# Altium PCB PCB2.PcbDoc
Units mm, origin at the board's own origin, x right, y up, seen from the top; angles counter-clockwise.
Board outline 50 x 50 mm, 2 copper layers (Top Layer, Bottom Layer); 21 components, 15 nets, 86 pads, 2 vias.
Unrouted connection lines stored in the file: 4.
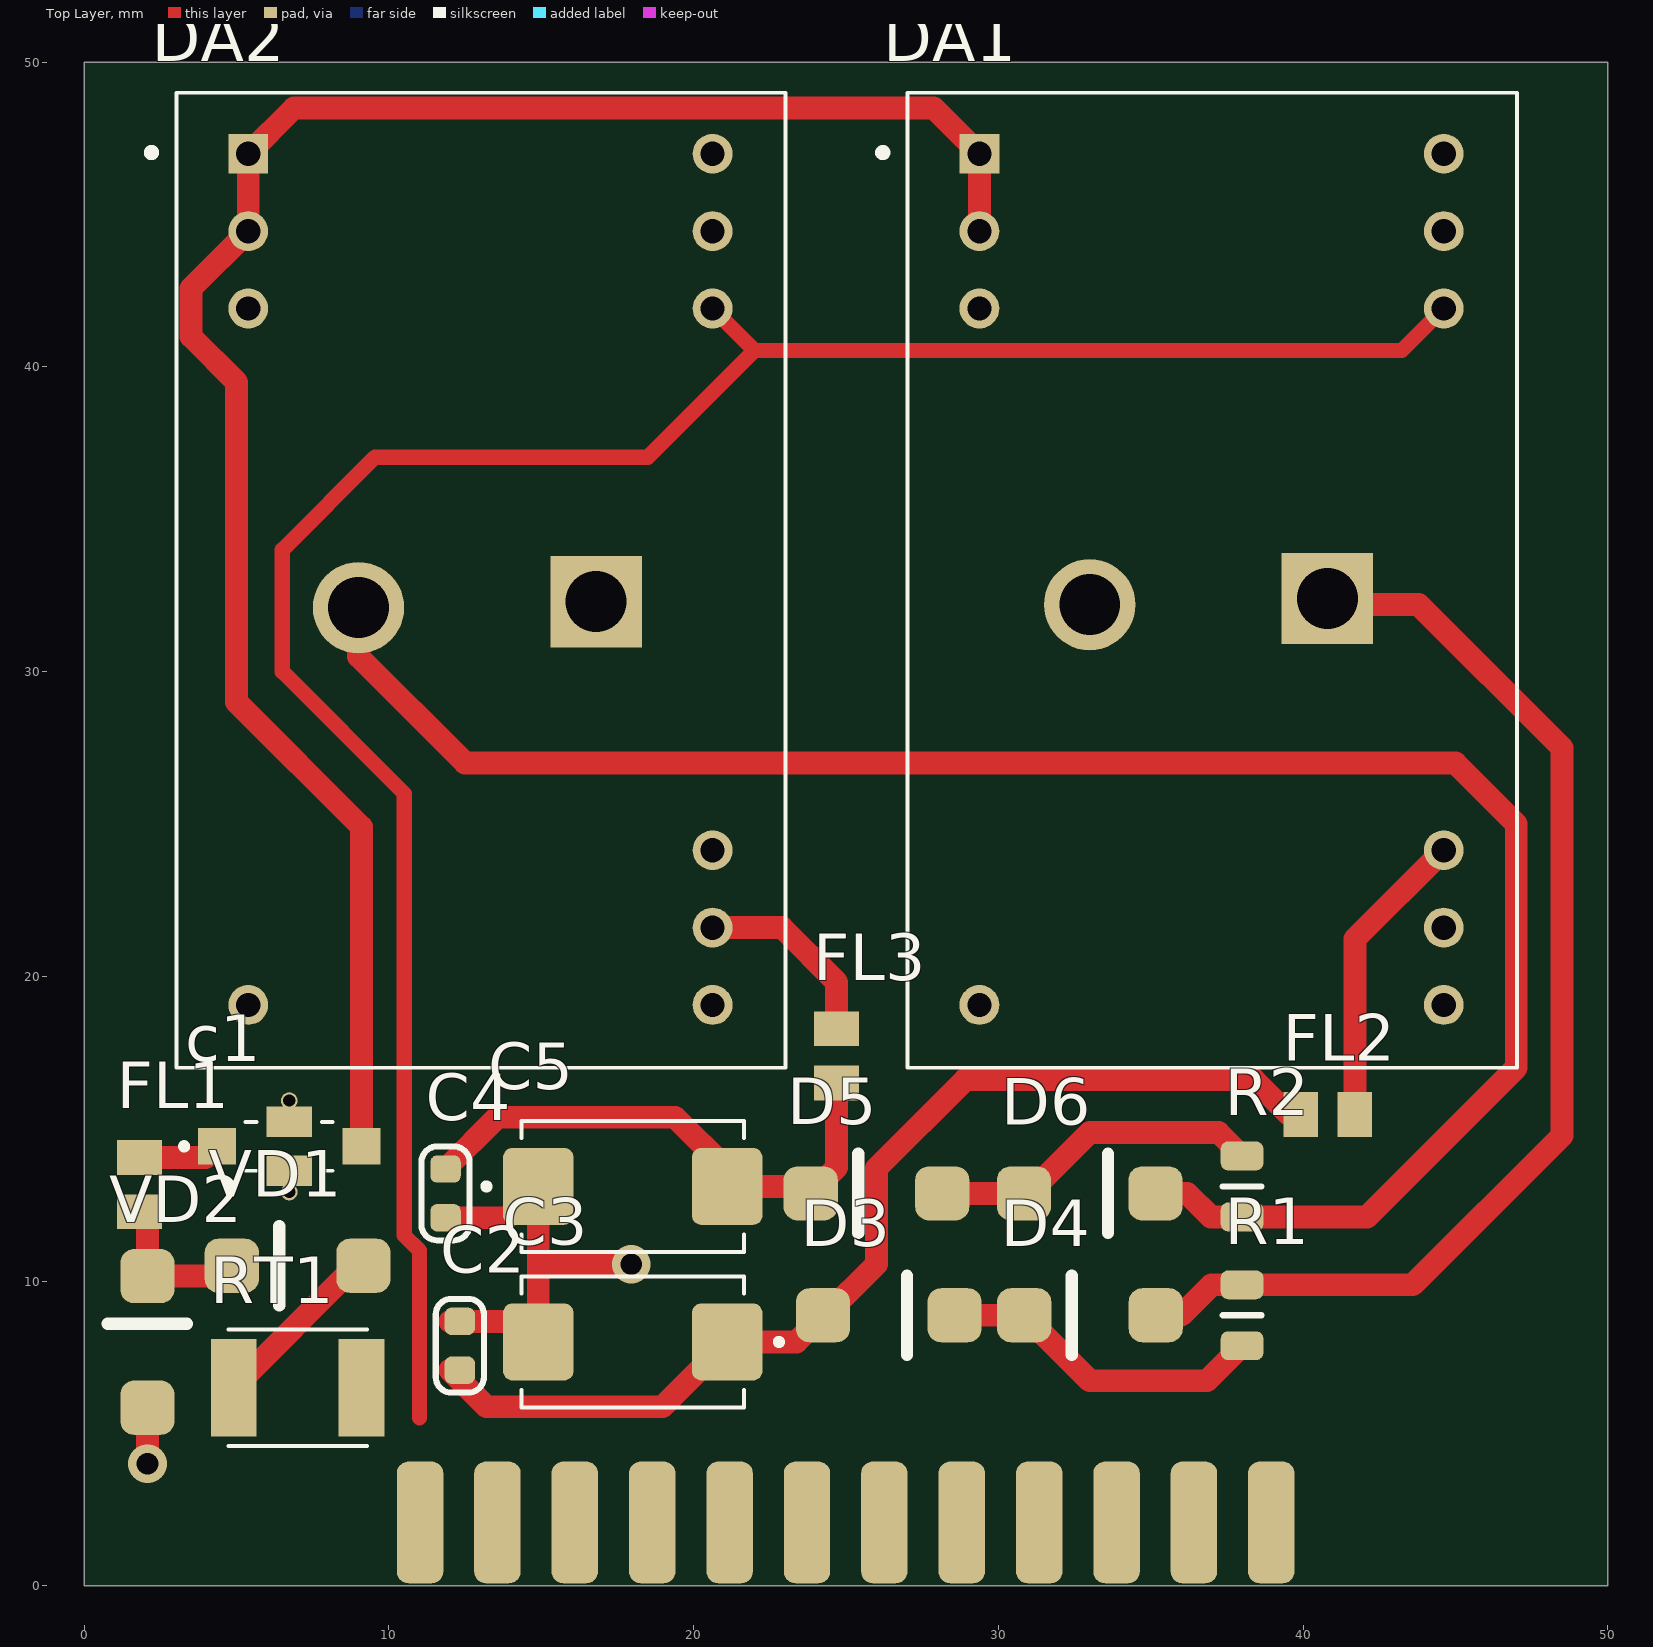
[diagram p0: Top Layer view]
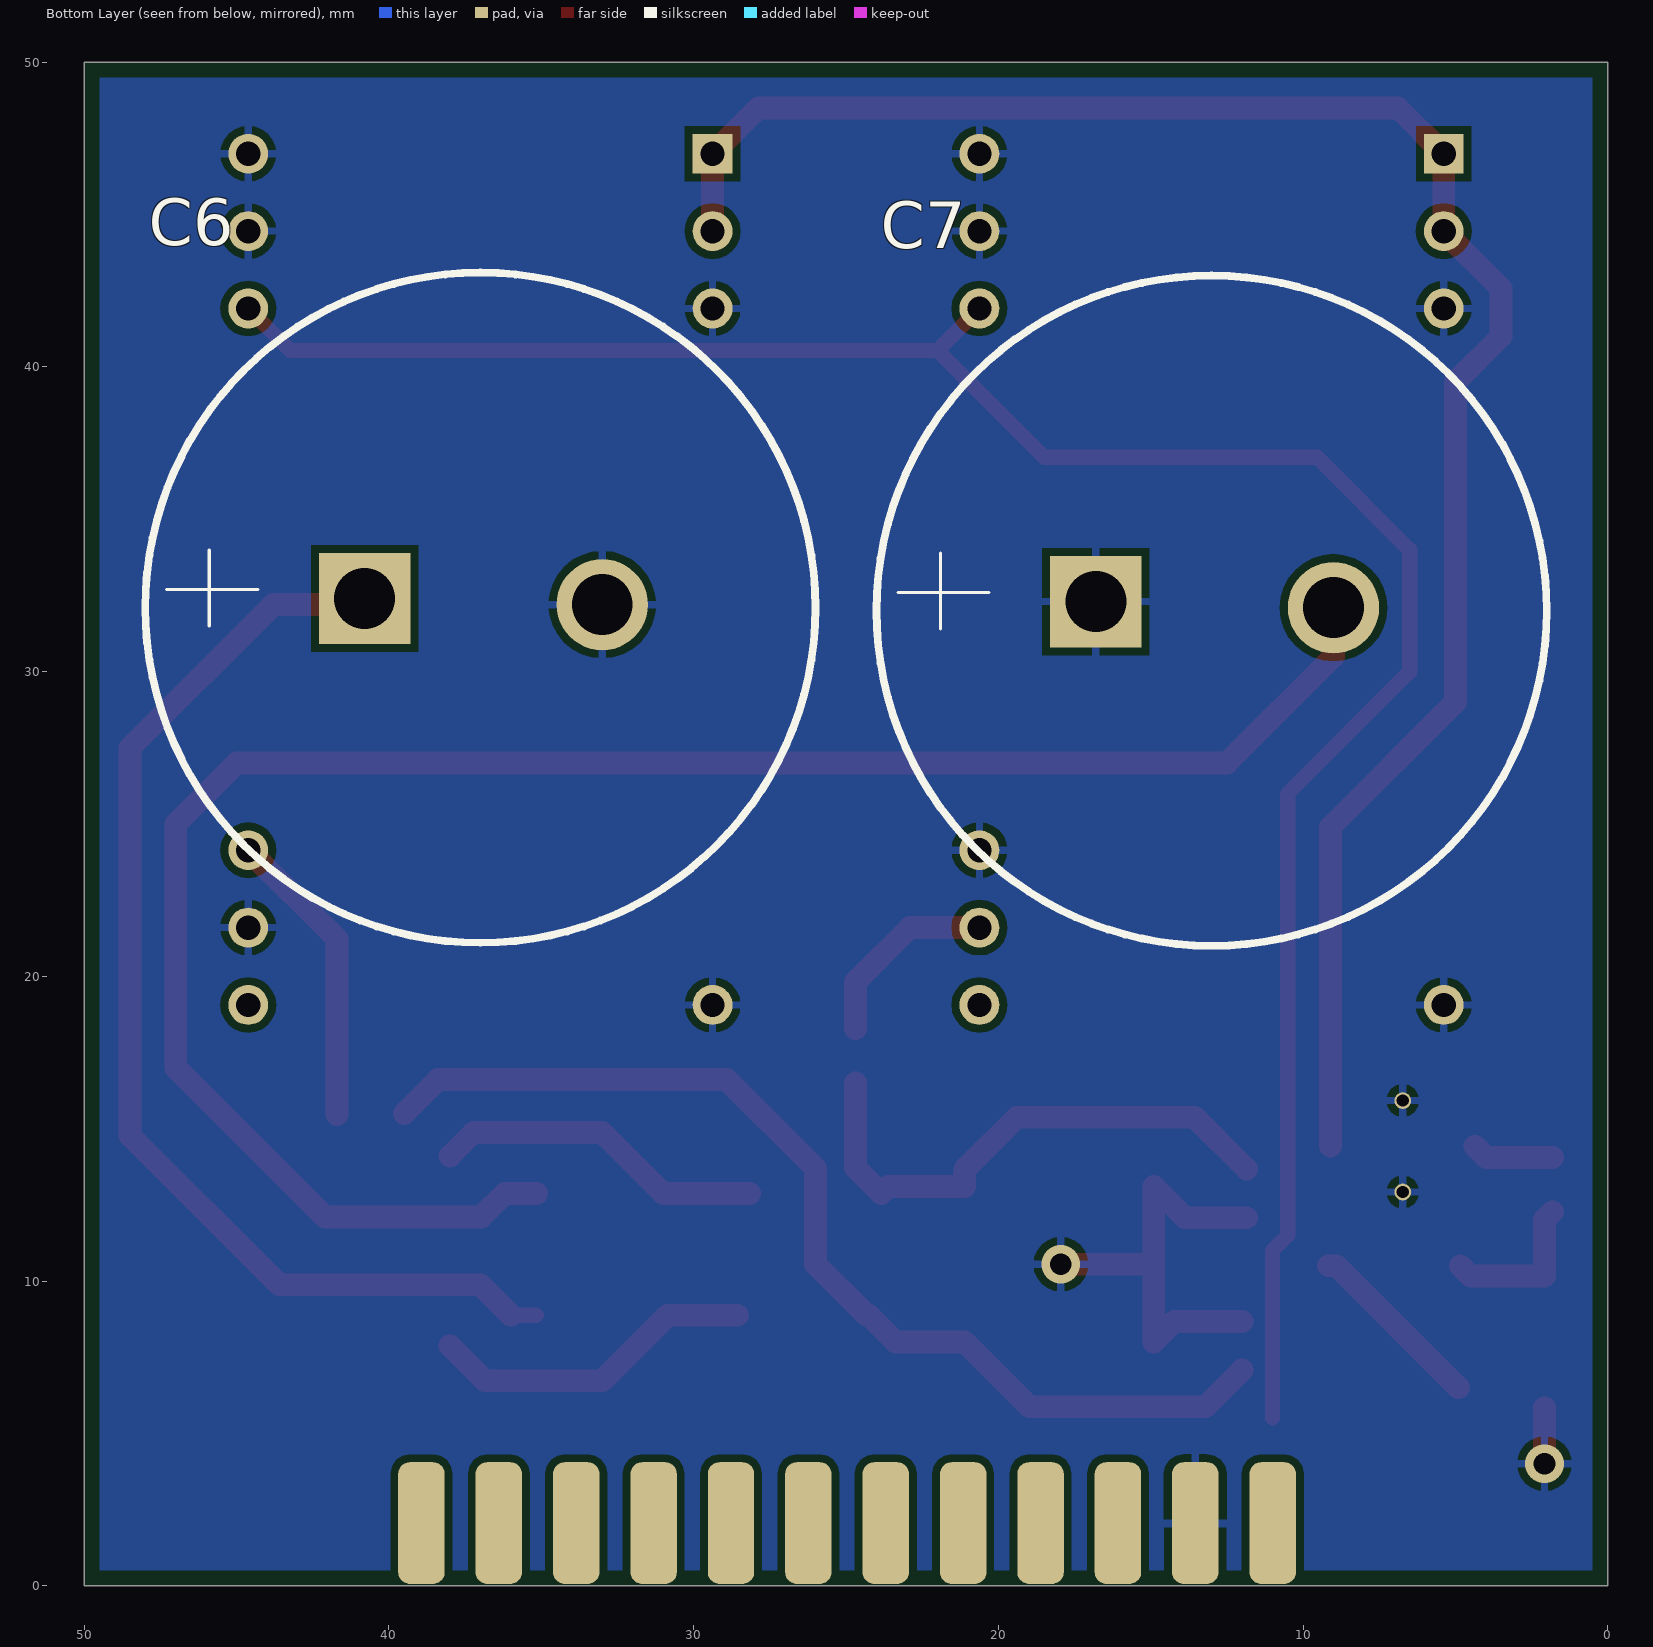
[diagram p1: Bottom Layer view, seen from below]
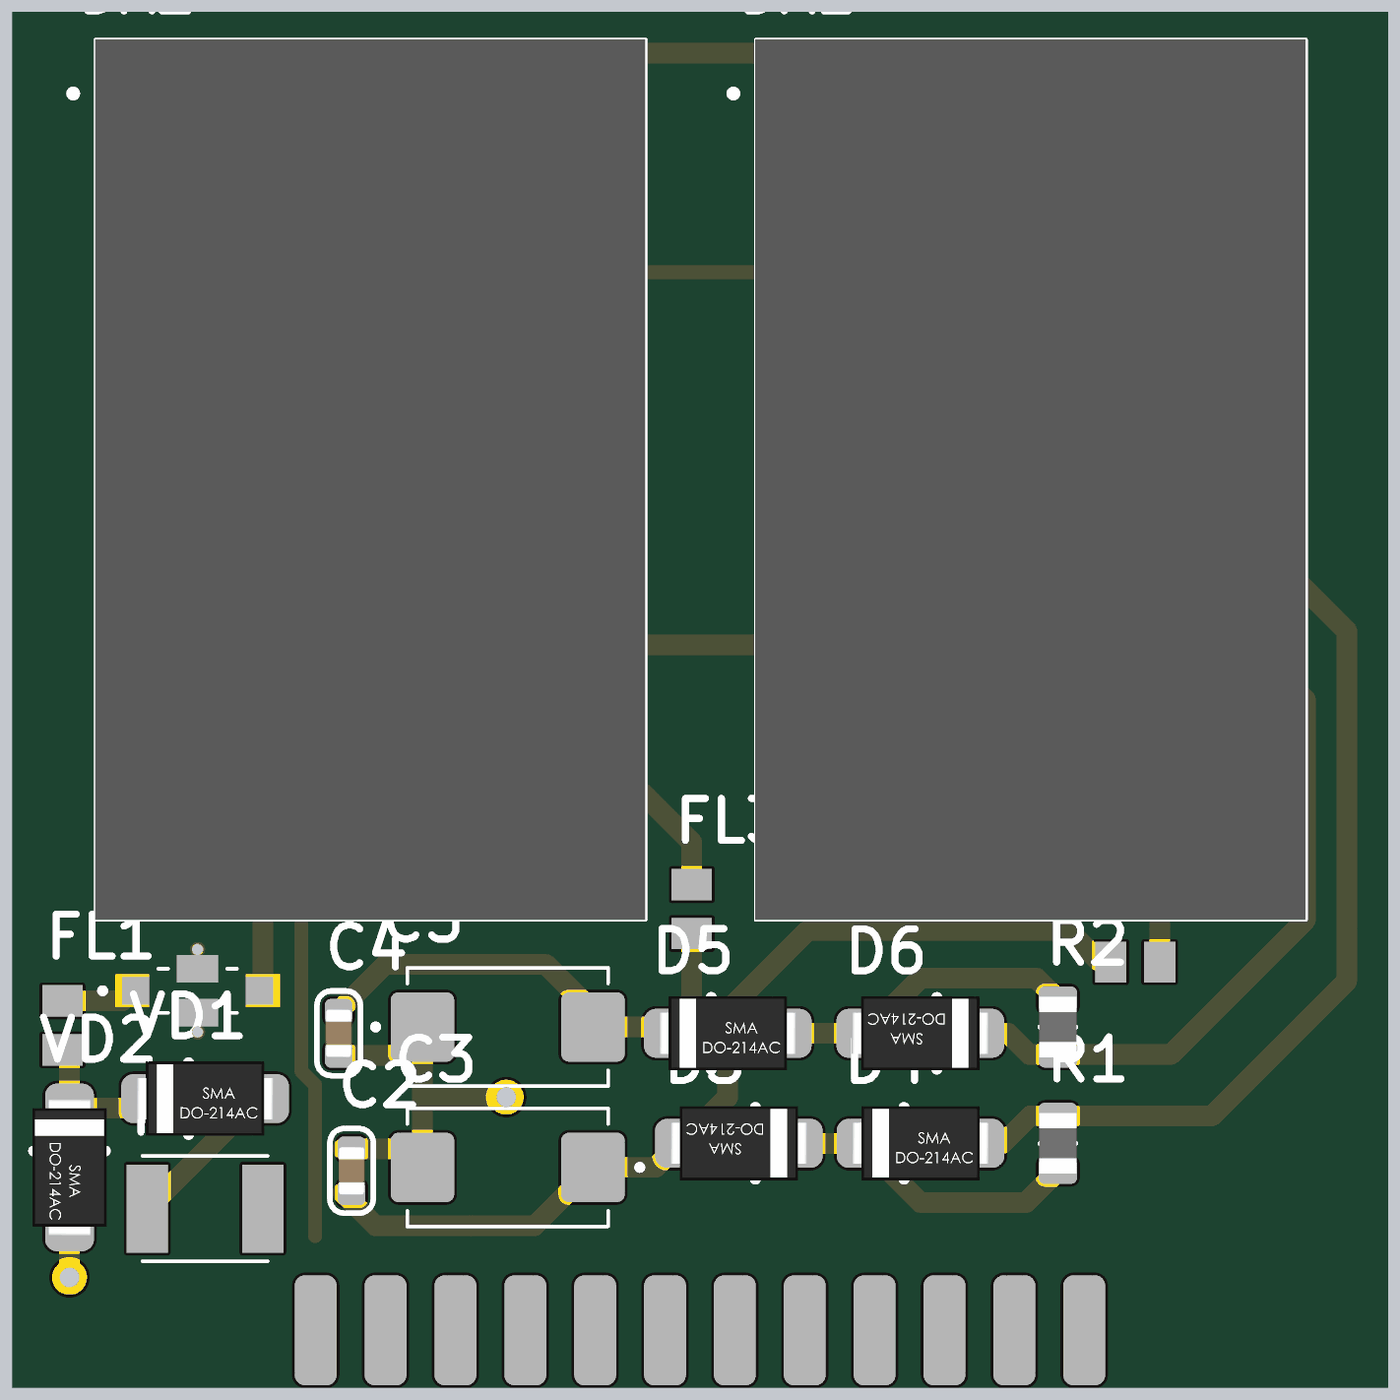
[diagram p2: 3D render of the assembled board from above, using the file's embedded part models]

## Layer stack, top to bottom
Top Solder: solder mask 0.0102, Solder Resist, Dk 3.5
Top Layer: signal copper 0.0356
Dielectric 1: dielectric 0.32, FR-4, Dk 4.8
Bottom Layer: signal copper 0.0356
Bottom Solder: solder mask 0.0102, Solder Resist, Dk 3.5

## Board outline
0,0 50,0 50,50 0,50

## Design rules (kind name [scope] priority, off if disabled: settings)
Clearance [All] p1: gap=0.254
PolygonConnect [All] p1: connectstyle=Relief reliefconductorwidth=0.254 reliefentries=4 polygonreliefangle="90 Angle" airgapwidth=0.254
RoutingVias [All] p1: holewidth=0.711 width=1.27 viastyle="Through Hole" minholewidth=0.711 minwidth=1.27 maxholewidth=0.711 maxwidth=1.27
SolderMaskExpansion [All] p1: expansion=0.102
Width [All] p1: maxlimit=1 minlimit=0.254 preferedwidth=0.5
30 further rules are at their usual default settings.

## Components (designator, comment, footprint, x,y, rotation, side; value= is the part's Value field where it differs from the comment)
c1 "1206Y2000103MXTE03" FIL_NFM41PC155B1E3L 6.725,14.421 r0 top
C2 "100n" CAP_0603 12.325,7.875 r270 top
C3 "100u" CAPPM7343X310N 18,8 r180 top
C4 "100n" CAP_0603 11.855,12.875 r270 top
C5 "100u" CAPPM7343X310N 18,13.104 r0 top
C6 "0,5F" "EECF5R5U474, 0.470 Ô, 5.5 Â, 5ìì" 37,32.1 r180 bottom
C7 "0,5F" "EECF5R5U474, 0.470 Ô, 5.5 Â, 5ìì" 13,32 r180 bottom
D3 "" "DO-214AC (SMA)" 26.404,8.875 r0 top
D4 "Diode 1N4" "DO-214AC (SMA)" 33.009,8.875 r180 top
D5 "" "DO-214AC (SMA)" 26,12.875 r180 top
D6 "" "DO-214AC (SMA)" 33,12.875 r0 top
DA1 "TVN_5-2411WI" CONV_TVN_5-2415WI 37,33 r0 top
DA2 "TVN_5-2411WI" CONV_TVN_5-2415WI 13,33 r0 top
FL1 "BLM15BX750SZ1D" BEADC2012X105N 1.813,13.162 r90 top
FL2 "BLM15BX750SZ1D" BEADC2012X105N 40.812,15.463 r180 top
FL3 "BLM15BX750SZ1D" BEADC2012X105N 24.693,17.39 r270 top
R1 "50" RES_0805 38,8.875 r90 top
R2 "50" RES_0805 38,13.104 r90 top
RT1 "0.35A" FUSER_MF-MSMF200-2 7,6.5 r180 top
VD1 "VS-15MQ040" "DO-214AC (SMA)" 7,10.5 r180 top
VD2 "SMAJ15" "DO-214AC (SMA)" 2.071,8 r90 top

## Footprints (in the part's own frame and the unit in brackets; to place one, negate y for a bottom-side part, rotate by r counter-clockwise, add the part's x,y. Pads: shape width x height; smd on the part's side, far side on the other; paste and mask are expansions set on the pad)
BEADC2012X105N [mm]
  rect 1.14x1.47 smd: 1(-0.89,0) 2(0.89,0)
CAP_0603 [mm] "Chip Resistor, EIA 0603, Metric 1608, Body 1.6x0.8mm, IPC Medium Density"
  rrect50% 0.9x1 smd: 1(-0.8,0) 2(0.8,0)
  silkscreen extent -1.54,-0.79 1.54,0.79, body extent -0.88,-0.48 0.87,0.48, height 0.85
CAPPM7343X310N [mm]
  rrect25% 2.31x2.52 smd: 1(-3.1,0) 2(3.1,0)
  silkscreen extent -4.9,-2.15 3.65,2.15
CONV_TVN_5-2415WI [mm]
  rect 1.308x1.308 hole 0.8: 1(-7.62,14)
  round 1.308 hole 0.8: 2(-7.62,11.46) 3(-7.62,8.92) 12(-7.62,-13.94) 13(7.62,-13.94) 14(7.62,-11.4) 15(7.62,-8.86) 22(7.62,8.92) 23(7.62,11.46) 24(7.62,14)
  silkscreen extent -10.89,-16 10.02,16, body extent -10,-16 10,16, height 10.7
"DO-214AC (SMA)" [mil] "DO-214-AC/SMA; 2 C-Bend Leads; Body 5 x 2.7 mm, inc. leads (LxW)"
  rrect50% 70x70 smd: 1(-85,0) 2(85,0)
  silkscreen extent 24,-51 24,51, body extent -98,-53 98,53, height 85
"EECF5R5U474, 0.470 Ô, 5.5 Â, 5ìì" [mm]
  rect 3x3 hole 2: 1(-3.8,0.3)
  round 3 hole 2: 2(4,0.1)
  silkscreen extent -11,-11 11,11, body extent -11,-11 11,11, height 9
FIL_NFM41PC155B1E3L [mm]
  rect 1.25x1.2 smd paste-2 mask+0: 1(-2.375,0) 3(2.375,0)
  rect 1.5x1 smd mask+0: 2(0,0.8) 2_1(0,-0.8)
  round 0.55 hole 0.4 mask+0: 2_3(0,1.5) 2_4(0,-1.5)
  silkscreen extent -3.55,-0.8 1.43,0.8
FUSER_MF-MSMF200-2 [mm]
  rect 1.5x3.2 smd: 1(-2.1,0) 2(2.1,0)
  silkscreen extent -2.28,-1.91 2.28,1.91
RES_0805 [mm] "Chip Resistor, EIA 0805, Metric 2012, Body 2.0x1.2mm, IPC Medium Density"
  rrect50% 0.95x1.4 smd: 1(-1,0) 2(1,0)
  silkscreen extent 0,-0.64 0,0.64, body extent -1.1,-0.67 1.1,0.68, height 0.6

## Part data
c1: "?Y??N‚?°?????µ N‡?µNˆ?µ?· ?????????µ??N??°N‚??NˆN‹ 1206 200?’ .01uF 20% X7R X2y N„???»N?N‚Nˆ"
C2 C4: library part _capacitor
C3 C5 C6 C7: library part _capacitor_pol
D3 D4 D5 D6: library part "Diode 1N4934", "1 Amp Fast Recovery Rectifier"
DA1 DA2: library part TVN_5-2415WI, "Isolated Module DC DC Converter 1 Output 24V    208mA 9V - 36V Input"
FL1 FL2 FL3: "N„?µNˆNˆ??N‚?????°N? N??°???±?°"
R1 R2: library part _resistor
RT1: library part _termistor
VD1: library part _diod_schottky
VD2: library part _diode_zener

## Free pads (board coordinates)
  rrect50% 1.524x4 smd far side: 2(26.235,2.052) 3(23.695,2.052) 4(21.155,2.052) 5(18.615,2.052) 6(16.075,2.052) 7(13.535,2.052) 8(10.995,2.052) 9(28.775,2.052) 10(31.315,2.052) 11(33.855,2.052) 12(36.395,2.052) 13(38.935,2.052)
  rrect50% 1.524x4 smd: 2(26.26,2.078) 3(23.72,2.078) 4(21.18,2.078) 5(18.64,2.078) 6(16.1,2.078) 7(13.56,2.078) 8(11.02,2.078) 9(28.8,2.078) 10(31.34,2.078) 11(33.88,2.078) 12(36.42,2.078) 13(38.96,2.078)

## Via types
v1: diameter 1.27, hole 0.711, Top Layer to Bottom Layer, 2 vias

## Nets (pads, with @x,y where several pads share a name; then routed paths per layer and width w, separated by ;. In a path a pad name is that pad's centre, name@x,y a point inside that pad or via, vN(x,y) a via of type N, cw(c..) or ccw(c..) an arc to the next point about the centre after c; other vN are vias at no path point)
+5V: D3.2 D4.2 pad.13@38.96,2.078 R1.1 | length 10.8
  Top Layer w0.75: D3.2 D4.2 33,6.725 36.85,6.725 R1.1
+5V(DC): DA1.15 FL2.1 | length 9.9
  Top Layer w0.75: FL2.1 41.702,21.222 DA1.15
+12V_POWER: pad.2@26.26,2.078 RT1.1
-5: DA2.14 FL3.1 | length 6.3
  Top Layer w0.75: DA2.14 22.9,21.6 24.693,19.807 FL3.1
-5V: D5.1 D6.1 pad.2@26.235,2.052 R2.2 | length 11
  Top Layer w0.5: D6.1 D6.1@31,12.875
  Top Layer w0.75: D5.1 D6.1 ; D6.1@31,12.875 33,14.875 37.229,14.875 R2.2
GND: c1.2 c1.2_1 c1.2_3 c1.2_4 C2.1 C3.2 C4.2 C5.1 C6.2 C7.1 DA1.3 DA1.12 DA1.14 DA1.23 DA1.24 DA2.3 DA2.12 DA2.15 DA2.23 DA2.24 pad.7@13.535,2.052 VD2.1 | length 16.6
  Top Layer w0.75: v1(2.071,4) VD2.1 ; C4.2 13.871,12.075 C5.1 14.9,10.552 ; C2.1@12,8.675 C2.1 14.225,8.675 C3.2 14.9,10.552 ; v1(17.948,10.552) 14.9,10.552
Netc1_1: c1.1 FL1.2 | length 2.7
  Top Layer w0.75: FL1.2 3.982,14.052 c1.1
Netc1_2: c1.3 DA1.1 DA1.2 DA2.1 DA2.2 | length 63.5
  Top Layer w0.75: c1.3 9.1,24.9 5,29 5,39.5 3.5,41 3.5,42.58 DA2.2 DA2.1 6.88,48.5 27.88,48.5 DA1.1 DA1.2
NetC2_2: C2.2 C3.1 D3.1 FL2.2 | length 34.7
  Top Layer w0.75: C2.2@12,7.075 13.2,5.875 18.975,5.875 C3.1 23.37,8 D3.1 24.323,8.875 26,10.552 26,13.7 28.91,16.61 38.39,16.61 FL2.2@39.5,15.5
NetC4_1: C4.1 C5.2 D5.2 FL3.2 | length 18
  Top Layer w0.75: C4.1 13.555,15.375 19.389,15.375 21.1,13.664 C5.2 23.612,13.104 D5.2 24.693,13.727 FL3.2
NetC6_1: C6.1 D4.1 R1.2 | length 38.2
  Top Layer w0.5: D4.1 D4.1@36,8.875
  Top Layer w0.75: D4.1@36,8.875 37,9.875 R1.2 43.603,9.875 48.5,14.772 48.5,27.5 43.8,32.2 41,32.2 C6.1
NetC7_2: C7.2 D6.2 R2.1 | length 64.1
  Top Layer w0.75: C7.2 9,30.5 12.5,27 45,27 47,25 47,17 42.104,12.104 R2.1 36.971,12.104 36.2,12.875 D6.2
NetFL1_1: FL1.1 VD1.2 VD2.2 | length 5.1
  Top Layer w0.75: FL1.1 2.071,12.014 VD2.2 4.5,10.159 VD1.2
NetRT1_2: RT1.2 VD1.1 | length 5.9
  Top Layer w0.75: RT1.2 8.9,10.5 VD1.1
ON_OFF_DC: DA1.22 DA2.22 pad.8@10.995,2.052 | length 73.7
  Top Layer w0.5: 11,5.5 11,11 10.5,11.5 10.5,26 6.5,30 6.5,34 9.54,37.04 18.5,37.04 22,40.54 ; DA2.22 22,40.54 ; DA1.22 43.24,40.54 22,40.54
pads on no net: DA1.13 DA2.13

## Polygon pours and split planes (outlines as drawn)
GND on Bottom Layer "Bottom Layer-No Net" (solid, pour order 0): 0.5,0.5 0.5,49.5 49.5,49.5 49.5,0.5